# Altium PCB project_5.PcbDoc
Units mil, origin at the board's own origin, x right, y up, seen from the top; angles counter-clockwise.
Board outline 3915 x 2275 mil, 2 copper layers (Top Layer, Bottom Layer); 16 components, 42 nets, 114 pads, 8 vias.
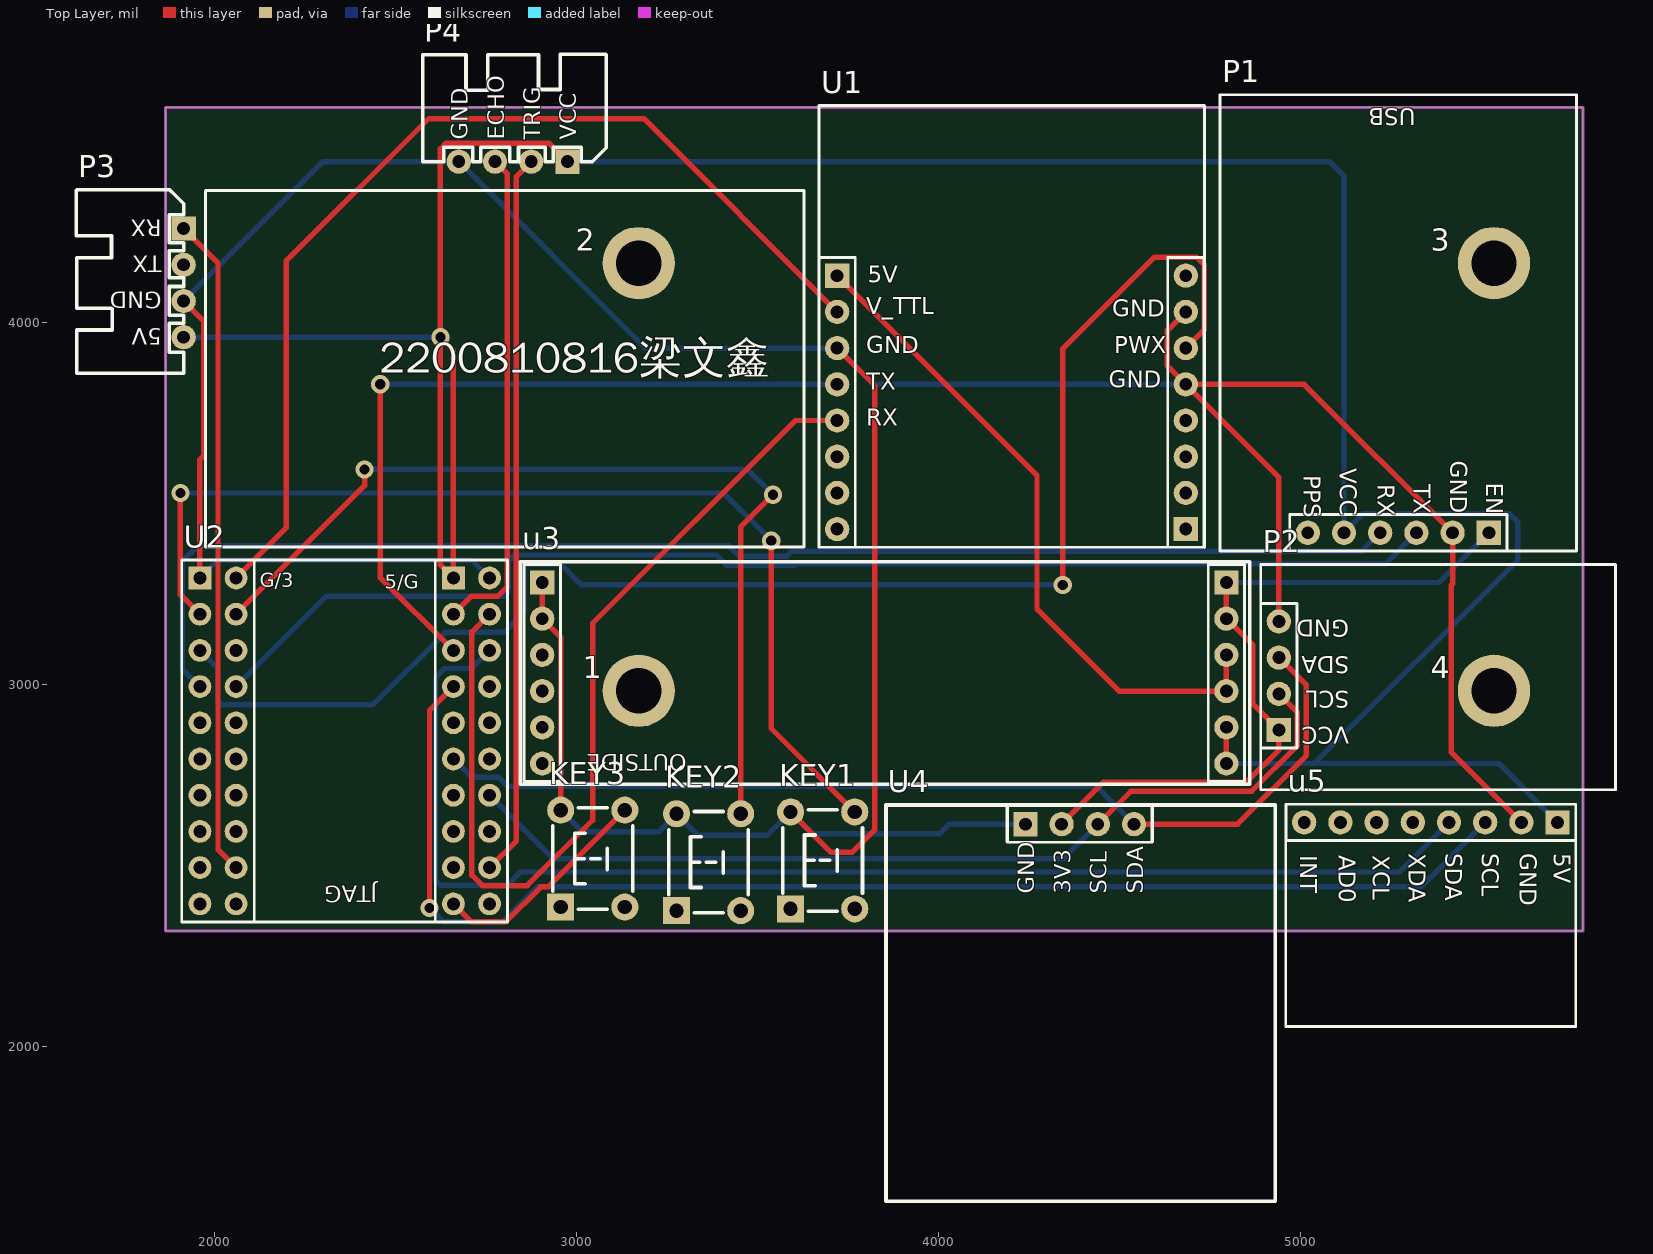
[diagram p0: Top Layer view]
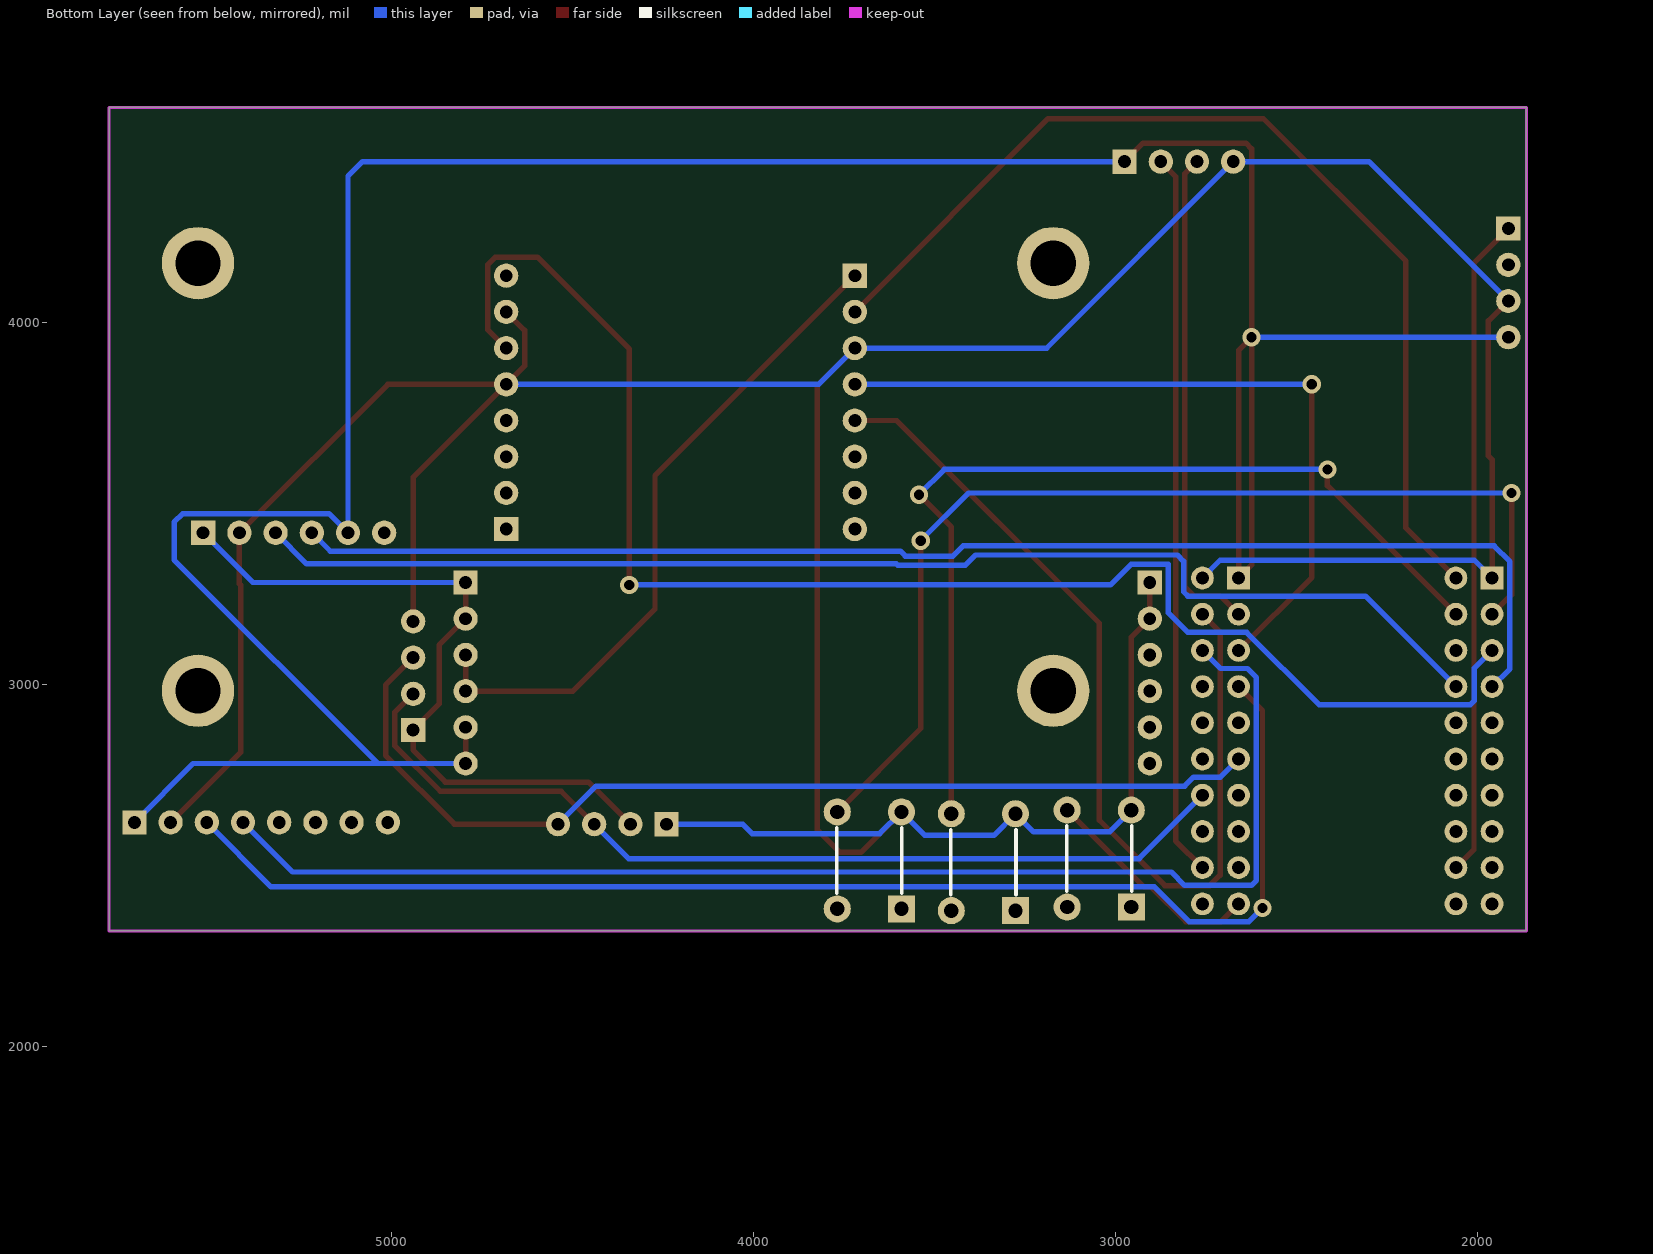
[diagram p1: Bottom Layer view, seen from below]

## Layer stack, top to bottom
Top Solder: solder mask 0.4, Solder Resist, Dk 3.5
Top Layer: signal copper 1.4
Dielectric 1: dielectric 12.6, FR-4, Dk 4.8
Bottom Layer: signal copper 1.4
Bottom Solder: solder mask 0.4, Solder Resist, Dk 3.5

## Board outline
1865,2320 5780,2320 5780,4595 1865,4595

## Design rules (kind name [scope] priority, off if disabled: settings)
Clearance [All] p1: gap=10 ignorepadtopadclearanceinfootprint=FALSE
PolygonConnect [All] p1: connectstyle=Relief reliefconductorwidth=10 reliefentries=4 polygonreliefangle="90 Angle" airgapwidth=10
RoutingVias [All] p1: holewidth=28 width=50 viastyle="Through Hole" minholewidth=28 minwidth=50 maxholewidth=28 maxwidth=50
SolderMaskExpansion [All] p1: expansion=4 istentingtop=FALSE
SupplyNets "Schematic Supply Nets_4" [InNet('GND')] p1: voltage=0.000
SupplyNets "Schematic Supply Nets_3" [InNet('3V3_MCU')] p2: voltage=0.000
SupplyNets "Schematic Supply Nets_2" [InNet('5V_POW')] p3: voltage=0.000
SupplyNets "Schematic Supply Nets_1" [InNet('5V')] p4: voltage=0.000
SupplyNets "Schematic Supply Nets" [InNet('3V3')] p5: voltage=0.000
Width [All] p1: maxlimit=100 minlimit=10 preferedwidth=15 minimp=50.000000 maximp=50.000000 favimp=50.000000
30 further rules are at their usual default settings.

## Classes and differential pairs
component class project_5: KEY1 KEY2 KEY3 P1 P2 P4 U1 U2 u3 U4 u5

## Components (designator, comment, footprint, x,y, rotation, side; value= is the part's Value field where it differs from the comment)
1 "M3" "M3 125X200" 3172.01,2983.5 r90 top
2 "M3" "M3 125X200" 3172.01,4164.61 r90 top
3 "M3" "M3 125X200" 5534.21,4164.61 r90 top
4 "M3" "M3 125X200" 5534.21,2983.5 r90 top
KEY1 "mod_buttom" MOD_BUTTOM 3680,2505 r90 top
KEY2 "mod_buttom" MOD_BUTTOM 3365,2500 r90 top
KEY3 "mod_buttom" MOD_BUTTOM 3045,2510 r90 top
P1 "port_6p" MOD_GPS 5267.63,3413.76 r180 top
P2 "port_4p" MOD_RTC 4940,3035 r90 top
P3 "port_4p" MOD_VOICE 1895,3955 r270 top
P4 "port_4p" MOD_ECHO 2840,4595 r0 top
U1 "MOD_SIM800" MOD_SIM800 4325,3885 r0 top
U2 "f1_hw_1_gw" F1_HW_1_GW 2350,2830 r90 top
u3 "pow_hw_1" pow_hw_1 3925,3055 r90 top
U4 "mod_oled" mod_oled 4394.91,2613.15 r0 top
u5 "mod_mpu6050" MOD_MPU6050 5534.02,2504.75 r270 top

## Footprints (in the part's own frame and the unit in brackets; to place one, negate y for a bottom-side part, rotate by r counter-clockwise, add the part's x,y. Pads: shape width x height; smd on the part's side, far side on the other; paste and mask are expansions set on the pad)
F1_HW_1_GW [mm]
  rect 1.6x1.6 hole 0.9: 1(11.811,9.906) 21(11.811,-7.874)
  round 1.6 hole 0.9: 2(11.811,7.366) 3(9.271,9.906) 4(9.271,7.366) 5(6.731,9.906) 6(6.731,7.366) 7(4.191,9.906) 8(4.191,7.366) 9(1.651,9.906) 10(1.651,7.366) 11(-0.889,9.906) 12(-0.889,7.366) 13(-3.429,9.906) 14(-3.429,7.366) 15(-5.969,9.906) 16(-5.969,7.366) 17(-8.509,9.906) 18(-8.509,7.366) 19(-11.049,9.906) 20(-11.049,7.366) 22(11.811,-10.414) 23(9.271,-7.874) 24(9.271,-10.414) 25(6.731,-7.874) 26(6.731,-10.414) 27(4.191,-7.874) 28(4.191,-10.414) 29(1.651,-7.874) 30(1.651,-10.414) 31(-0.889,-7.874) 32(-0.889,-10.414) 33(-3.429,-7.874) 34(-3.429,-10.414) 35(-5.969,-7.874) 36(-5.969,-10.414) 37(-8.509,-7.874) 38(-8.509,-10.414) 39(-11.049,-7.874) 40(-11.049,-10.414)
  silkscreen extent -12.32,-11.68 13.08,11.18, body extent -12.38,-11.68 13.08,11.18, height 8.5
"M3 125X200" [mil] "M3螺丝孔，孔125Mil，焊盘200Mil"
  round 200 hole 125: 1(0,0)
MOD_BUTTOM [mm]
  rect 1.9x1.9 hole 1: 1(-3.146,2.25)
  round 1.9 hole 1: 2(-3.146,-2.25) 3(3.654,-2.25) 4(3.654,2.25)
  silkscreen extent -3.3,-2.79 3.81,2.79, body extent -3.85,-3 4.36,3, height 4.25
MOD_ECHO [mm] "超声波模块"
  rect 1.7x1.7 hole 0.9: 1(3.429,-3.81)
  round 1.7 hole 0.9: 2(0.889,-3.81) 3(-1.651,-3.81) 4(-4.191,-3.81)
  silkscreen extent -6.73,-3.81 6.15,3.72, body extent -6.65,-4.1 5.97,3.6, height 5.73
MOD_GPS [mm]
  rect 1.7x1.7 hole 0.9: 1(-6.41,-0.158)
  round 1.7 hole 0.9: 2(-3.87,-0.158) 3(-1.33,-0.158) 4(1.21,-0.158) 5(3.75,-0.158) 6(6.29,-0.158)
  silkscreen extent -12.56,-30.89 12.44,1.11, body extent -7.68,-1.43 7.56,1.11, height 8.5
MOD_MPU6050 [mm]
  rect 1.7x1.7 hole 0.9: 1(-2.927,4.47)
  round 1.7 hole 0.9: 2(-2.927,1.93) 3(-2.927,-0.61) 4(-2.927,-3.15) 5(-2.927,-5.69) 6(-2.927,-8.23) 7(-2.927,-10.77) 8(-2.927,-13.31)
  silkscreen extent -4.2,-14.61 11.41,5.74, body extent -4.2,-14.58 -1.66,5.74, height 8.5
mod_oled [mm] "外购屏幕模块接口"
  rect 1.7x1.7 hole 0.9: 1(-3.935,0.047)
  round 1.7 hole 0.9: 2(-1.395,0.047) 3(1.145,0.047) 4(3.685,0.047)
  silkscreen extent -13.72,-26.4 13.58,1.4, body extent -13.72,-26.42 13.59,1.4, height 8.5
MOD_RTC [mm] "时钟模块"
  rect 1.7x1.7 hole 0.9: 1(-4.064,0)
  round 1.7 hole 0.9: 2(-1.524,0) 3(1.016,0) 4(3.556,0)
  silkscreen extent -8.25,-23.63 7.55,1.27, body extent -5.33,-1.27 4.83,1.27, height 8.5
MOD_SIM800 [mm]
  rect 1.7x1.7 hole 0.9: 1(-15.367,6.223) 16(9.093,-11.557)
  round 1.7 hole 0.9: 2(-15.367,3.683) 3(-15.367,1.143) 4(-15.367,-1.397) 5(-15.367,-3.937) 6(-15.367,-6.477) 7(-15.367,-9.017) 8(-15.367,-11.557) 9(9.093,6.223) 10(9.093,3.683) 11(9.093,1.143) 12(9.093,-1.397) 13(9.093,-3.937) 14(9.093,-6.477) 15(9.093,-9.017)
  silkscreen extent -16.64,-12.84 10.41,18.17, body extent -16.64,-12.83 10.36,7.49, height 8.5
MOD_VOICE [mm]
  rect 1.7x1.7 hole 0.9: 1(-7.747,0.508)
  round 1.7 hole 0.9: 2(-5.207,0.508) 3(-2.667,0.508) 4(-0.127,0.508)
  silkscreen extent -10.46,-7.02 14.59,44.03, body extent -10.25,-6.84 2.37,0.86, height 5.73
pow_hw_1 [mm] "pow_hw_1"
  round 1.7 hole 0.9: 0(3.24,25.897) 1(-1.84,25.897) 1(0.7,25.897) 2(-6.92,25.897) 2(-4.38,25.897) 3(3.24,-22.103) 4(-1.84,-22.103) 4(0.7,-22.103) 5(-6.92,-22.103) 5(-4.38,-22.103)
  rect 1.7x1.7 hole 0.9: 0(5.78,25.897) 3(5.78,-22.103)
  silkscreen extent -8.38,-23.75 7.24,27.43, body extent -8.38,-23.75 7.24,27.43, height 8.5

## Part data
1 2 3 4: library part prot_m3, "m3铜柱孔", BOM名称=铜柱孔, 学习资源=www.ooocke.com, 版权归属=源创客
KEY1 KEY2 KEY3: "6*6*4.3按键"
P1: "6P模块接口"
P2 P3 P4: "4P模块接口"
U1: "SIM800短信模块"
u3: "三路降压电源模块 / 6p排母*2"
U4: "oled模块 / 4p排母"
u5: "陀螺仪模块"

## Via types
v1: diameter 50, hole 28, Top Layer to Bottom Layer, 8 vias

## Nets (pads, with @x,y where several pads share a name; then routed paths per layer and width w, separated by ;. In a path a pad name is that pad's centre, name@x,y a point inside that pad or via, vN(x,y) a via of type N, cw(c..) or ccw(c..) an arc to the next point about the centre after c; other vN are vias at no path point)
3V3: P1.1 P2.1 u3.3 U4.2 | length 1989.1
  Top Layer w15: U4.2 4456,2731 4850.92,2731 4940,2820.08 P2.1 4868,2947 4868,3109.76 4795.2,3182.56 u3.3@4795.2,3282.56
  Bottom Layer w15: u3.3@4795.2,3282.56 5382.56,3282.56 P1.1
3V3_MCU: U1.2 U2.2 | length 2838.6
  Top Layer w15: U2.2 2198,3433 2198,4170 2592,4564 3186,4564 U1.2
5V: P1.5 P3.4 P4.1 U2.21 u3.5 u5.1 | length 8607.6
  Top Layer w15: P4.1 2924,4496 2640,4496 2624,4480 v1(2624,3960) ; u3.5@4795.2,2782.56 u3.5@4795.2,2882.56 ; v1(2624,3960) 2624,3331 U2.21 2660,3924 v1(2624,3960)
  Bottom Layer w15: P3.4 v1(2624,3960) ; P4.1 5080,4445 5120,4405 P1.5 5173,3473 5576,3473 5600,3449 5600,3345 5037.56,2782.56 ; u3.5@4795.2,2782.56 5037.56,2782.56 ; u5.1 5547.44,2782.56 5037.56,2782.56
5V_POW: U1.1 u3.4 | length 1866.6
  Top Layer w15: U1.1 4272,3578 4272,3209 4498.44,2982.56 4795.2,2982.56 u3.4@4795.2,3082.56
BOOT0: U2.35
GND: KEY1.4 KEY2.4 KEY3.4 P1.2 P2.4 P3.3 P4.4 U1.3 U1.10 U1.12 U2.1 U2.22 u3.0 U4.1 u5.2 | length 11351.4
  Top Layer w15: P3.3 1970,4005 1970,3632 1960,3622 U2.1 ; u3.0@2905.43,3282.56 2905.43,3182.56 2956.42,3131.58 KEY3.4 ; KEY1.4 3703.28,2537 3761,2537 3824,2600 3824,3826 U1.3 ; U1.10 4632,3979.01 4632,3880.99 U1.12 ; P2.4 4940,3572.99 U1.12 ; u5.2 5416,2814 5416,3275 5420,3279 P1.2 5010,3830 U1.12
  Bottom Layer w15: P3.3 2300,4445 P4.4 3190,3930 U1.3 3820,3830 U1.12 ; U2.1 2009,3344 2711,3344 U2.22 ; KEY3.4 3016.28,2594 3226.56,2594 KEY2.4 3336.28,2584 3526.56,2584 KEY1.4 3651.28,2589 4004,2589 4030,2615 U4.1
NRST: U2.12
PA0: U2.20
PA1: U2.19
PA2: P3.1 U2.18 | length 1825.1
  Top Layer w15: P3.1 2010,4165 2010,2545 U2.18
PA3: U2.17
PA4: U2.16
PA5: U2.15
PA6: U2.14
PA7: U2.13
PA8: P4.3 U2.23 | length 1368.6
  Top Layer w15: U2.23 2710,3245 2783,3245 2809,3271 2809,4411 P4.3
PA9: U1.5 U2.24 | length 2613.2
  Top Layer w15: U2.24 2711,3146 2711,2474 2740,2445 2863.56,2445 3045,2626.44 3045,3170.37 3604.63,3730 U1.5
PA10: U1.4 U2.25 | length 2080.7
  Top Layer w15: v1(2458,3830) 2458,3297 U2.25
  Bottom Layer w15: v1(2458,3830) U1.4
PA11: U2.26 u5.4 | length 3616.9
  Bottom Layer w15: U2.26 2710,3045 2636,3045 2611,3020 2611,2460 2625,2446 2809,2446 2846,2483 5273,2483 u5.4
PA12: U2.27 u5.3 | length 3683.6
  Top Layer w15: v1(2594,2384) 2594,2929 U2.27
  Bottom Layer w15: v1(2594,2384) 2632,2346 2797,2346 2893,2442 5332,2442 u5.3
PA13: U2.28
PA14: U2.29
PA15: U2.30
PB0: U2.11
PB1: U2.9
PB2: U2.10
PB3: U2.32
PB4: P2.3 U2.31 U4.4 | length 2810.7
  Top Layer w15: U4.4 4826,2615 5015.97,2804.97 5015.97,2999.03 P2.3
  Bottom Layer w15: U2.31 2710,2745 2784,2745 2809,2720 4435,2720 U4.4
PB5: P2.2 U2.34 U4.3 | length 2596.8
  Top Layer w15: U4.3 4531,2706 4865,2706 4990.97,2831.97 4990.97,2924.03 P2.2
  Bottom Layer w15: U2.34 2935,2520 4345,2520 U4.3
PB6: U2.33
PB7: U2.36
PB8: P4.2 U2.38 | length 1997.6
  Top Layer w15: U2.38 2834,2569 2834,4404 P4.2
PB9: U2.37
PB10: P1.4 U2.7 | length 3730.7
  Bottom Layer w15: U2.7 1911,3044 1911,3340 1954.53,3383.53 3421.19,3383.53 3449.22,3355.5 3580.5,3355.5 3594,3369 5169,3369 P1.4
PB11: P1.3 U2.8 | length 3508.7
  Bottom Layer w15: U2.8 2310,3245 2800,3245 2812,3257 2812,3341.06 2829.47,3358.53 3386.19,3358.53 3414.43,3330.28 3601.78,3330.28 3605.5,3334 5234,3334 P1.3
PB12: U1.11 U2.5 | length 4168.2
  Top Layer w15: v1(4343,3276) 4343,3927 4597,4181 4713,4181 4734,4160 4734,3981.01 U1.11
  Bottom Layer w15: U2.5 2009,3046 2009,2956 2020,2945 2438,2945 2638,3145 2800,3145 2854.47,3199.47 2854.47,3333.53 2956.4,3333.53 3013.93,3276 v1(4343,3276)
PB13: U2.6
PB14: KEY1.3 U2.3 | length 2888.4
  Top Layer w15: v1(1906,3529.82) 1906,3249 U2.3 ; v1(3538,3398) 3538,2879.44 KEY1.3
  Bottom Layer w15: v1(1906,3529.82) 3406.18,3529.82 v1(3538,3398)
PB15: KEY2.3 U2.4 | length 2622.2
  Top Layer w15: U2.4 2415,3550 v1(2415,3595) ; KEY2.3 3453.58,3435.58 v1(3543,3525)
  Bottom Layer w15: v1(2415,3595) 3473,3595 v1(3543,3525)
PC13: KEY3.3 U2.39 | length 621.4
  Top Layer w15: U2.39 2709,2346 2805.52,2346 2901.52,2442 2921.72,2442 KEY3.3
USART2_RX: P3.2
VBAT: U2.40
pads on no net: 1.1 2.1 3.1 4.1 KEY1.1 KEY1.2 KEY2.1 KEY2.2 KEY3.1 KEY3.2 P1.6 U1.6 U1.7 U1.8 U1.9 U1.13 U1.14 U1.15 U1.16 u3.1 u3.2 u5.5 u5.6 u5.7 u5.8

## Keep-outs
Keep-Out Layer:
  lines w7.87: 1865,2320 5780,2320 5780,4595 1865,4595 1865,4410 1865,2320

## Silkscreen, mask and mechanical layers (free items; w line width, h text height)
Top Overlay:
  text "2200810816梁文鑫" at 2455.1,3832.81 h150

## Text inside footprints (layer, text, board x,y; h text height)
P1: Top Overlay "RX" at 5197.63,3553.76 h78.74 r270; Top Overlay "EN" at 5497.63,3558.76 h78.74 r270; Top Overlay "VCC" at 5093.34,3598.71 h78.74 r270; Top Overlay "PPS" at 4993.34,3578.76 h78.74 r270; Top Overlay "TX" at 5297.63,3553.71 h78.74 r270; Top Overlay "GND" at 5398.34,3618.71 h78.74 r270; Top Overlay "USB" at 5317.57,4608.05 h78.74 r180
P2: Top Overlay "VCC" at 5134.95,2899.29 h78.74 r180; Top Overlay "SCL" at 5134.95,2999.29 h78.74 r180; Top Overlay "SDA" at 5134.95,3094.29 h78.74 r180; Top Overlay "GND" at 5134.95,3194.29 h78.74 r180
P3: Top Overlay "RX" at 1855,4285 h45 r180; Top Overlay "TX" at 1855,4185 h45 r180; Top Overlay "GND" at 1855,4085 h45 r180; Top Overlay "5V" at 1855,3985 h45 r180
P4: Top Overlay "VCC" at 3000,4505 h45 r90; Top Overlay "TRIG" at 2900,4505 h45 r90; Top Overlay "ECHO" at 2800,4505 h45 r90; Top Overlay "GND" at 2700,4505 h45 r90
U1: Top Overlay "5V" at 3805.05,4095.71 h78.74; Top Overlay "V_TTL" at 3800.05,4008.57 h78.74; Top Overlay "GND" at 3800.05,3900.71 h78.74; Top Overlay "TX" at 3800.05,3800 h78.74; Top Overlay "RX" at 3800,3700 h78.74; Top Overlay "GND" at 4480.05,4000.71 h78.74; Top Overlay "PWX" at 4485,3900 h78.74; Top Overlay "GND" at 4470.05,3805.71 h78.74
U2: Top Overlay "JTAG" at 2450,2445 h45 r180; Top Overlay "G/3" at 2125,3270 h39.37; Top Overlay "5/G" at 2470,3265 h39.37
u3: Top Overlay "OUTSIDE" at 3304.16,2808.77 h45 r180
U4: Top Overlay "GND" at 4264.91,2423.15 h45 r90; Top Overlay "SDA" at 4564.91,2423.15 h45 r90; Top Overlay "SCL" at 4464.91,2423.15 h45 r90; Top Overlay "3V3" at 4364.91,2423.15 h45 r90
u5: Top Overlay "5V" at 5684.73,2534.7 h78.74 r270; Top Overlay "GND" at 5589.73,2534.7 h78.74 r270; Top Overlay "SCL" at 5484.73,2534.7 h78.74 r270; Top Overlay "SDA" at 5384.73,2534.7 h78.74 r270; Top Overlay "XDA" at 5284.02,2534.7 h78.74 r270; Top Overlay "XCL" at 5184.73,2529.7 h78.74 r270; Top Overlay "AD0" at 5089.73,2529.7 h78.74 r270; Top Overlay "INT" at 4984.02,2529.75 h78.74 r270